# Altium PCB STM32F103ZET6.PCBDOC (part 1 of 4)
Units mil, origin at the board's own origin, x right, y up, seen from the top; angles counter-clockwise.
Board outline 4000 x 2280 mil, 2 copper layers (Top Layer, Bottom Layer); 80 components, 152 nets, 495 pads, 75 vias.
Unrouted connection lines stored in the file: 4.
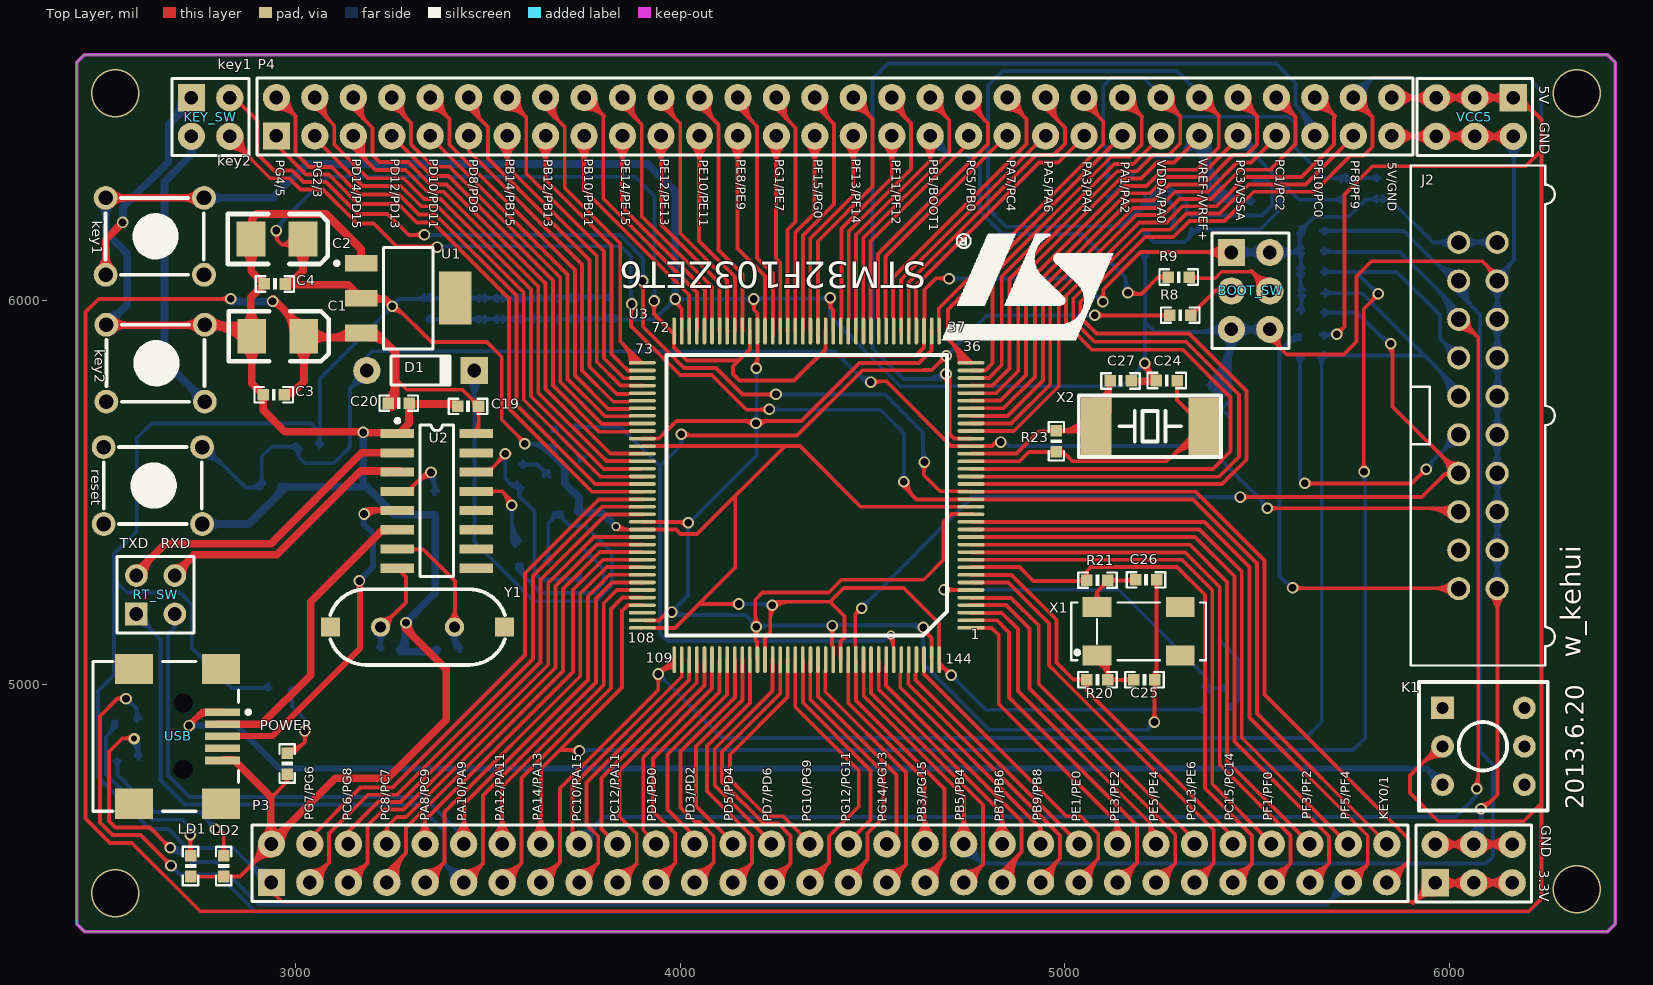
[diagram p0: Top Layer view]
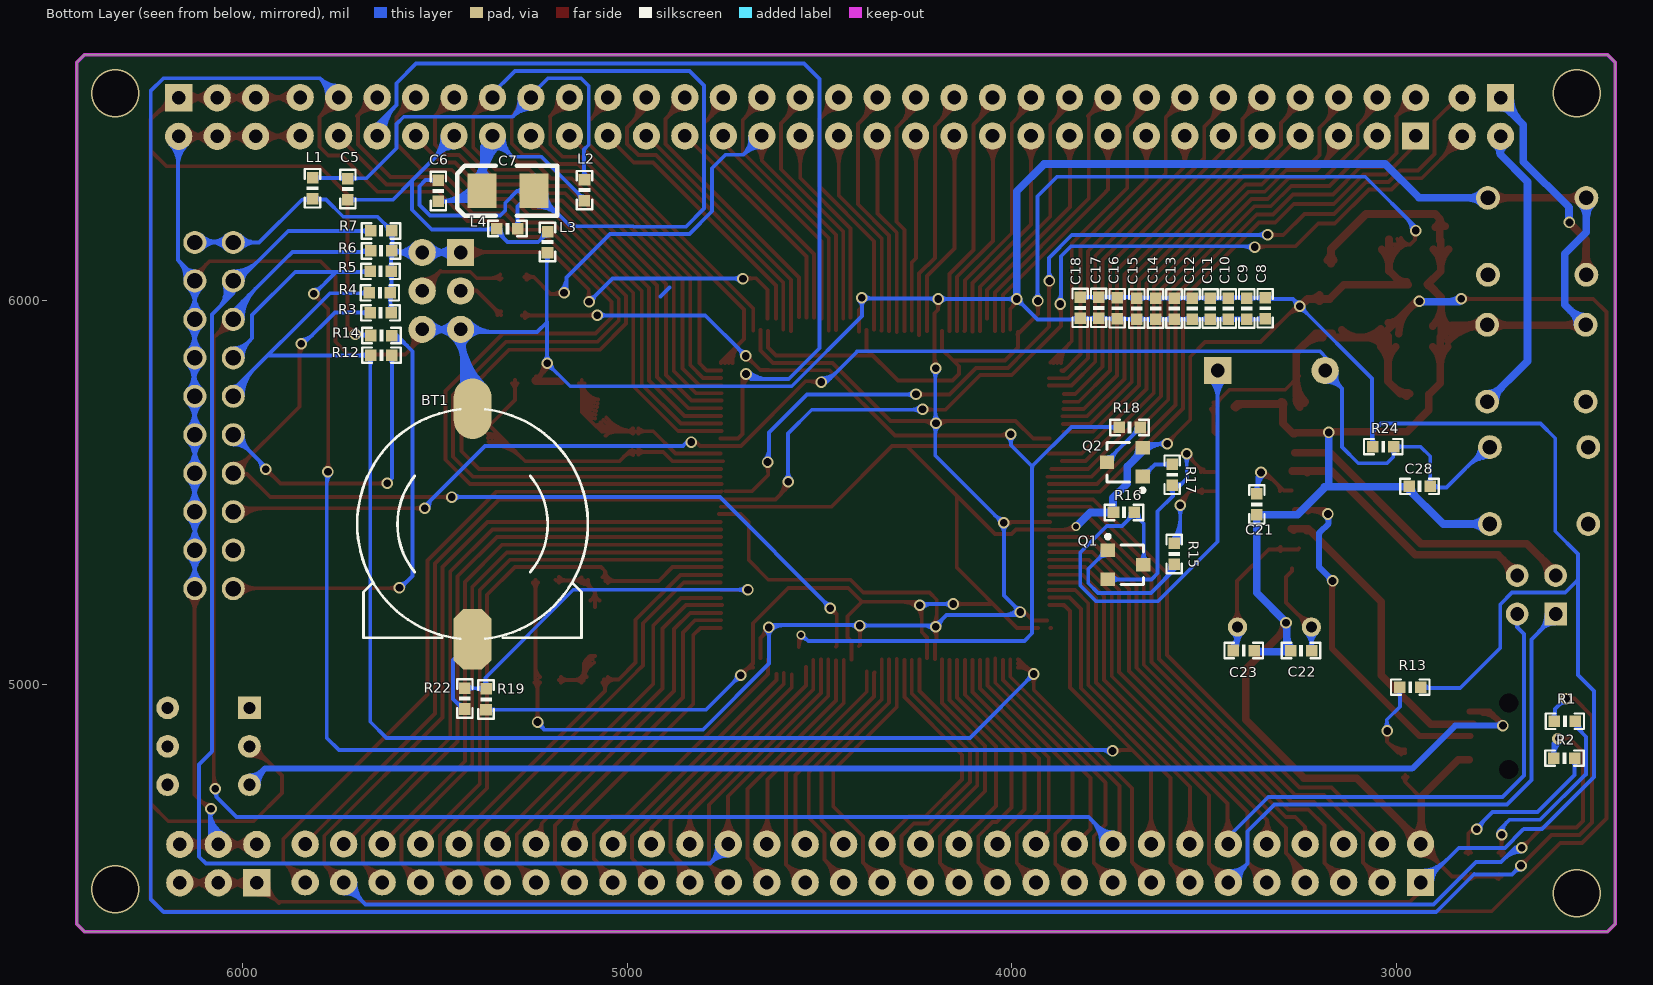
[diagram p1: Bottom Layer view, seen from below]

## Layer stack, top to bottom
Top Layer: signal copper 1.4
Dielectric: dielectric 12.6, FR-4, Dk 4.8
Bottom Layer: signal copper 1.4

## Board outline
2431,4378 2431,6618 2451,6638 6411,6638 6431,6618 6431,4378 6411,4358 2451,4358

## Design rules (kind name [scope] priority, off if disabled: settings)
Clearance [All] p1: gap=9
ComponentClearance [All] p1: gap=1 collisioncheckmode=3 verticalgap=1
HoleSize [All] p1: absolutevalues=TRUE maxlimit=300 minlimit=1 maxpercent=80.000 minpercent=20.000
PlaneConnect [All] p1: planeconnectstyle=Direct reliefexpansion=20 reliefentries=4 reliefconductorwidth=10 reliefairgap=10
PolygonConnect [All] p1: connectstyle=Direct reliefconductorwidth=10 reliefentries=4 polygonreliefangle="90 Angle"
RoutingVias [All] p1: holewidth=2 width=50 viastyle="Through Hole" minholewidth=1 minwidth=1 maxholewidth=200 maxwidth=300
SolderMaskExpansion [All] p1: expansion=4
TestPointUsage [All] p1: valid=0 allowmultiple=FALSE
Testpoint [All] p1: side=3 testpointundercomponent=TRUE minsize=40 maxsize=100 preferedsize=60 minholesize=0 maxholesize=40 preferedholesize=32 testpointgrid=1 style=297 order=0-112345678
Width [All] p1: maxlimit=80 minlimit=10 preferedwidth=10
16 further rules are at their usual default settings.

## Classes and differential pairs
component class STM32F103ZET6: Designator2 J2 U?

## Components (designator, comment, footprint, x,y, rotation, side; value= is the part's Value field where it differs from the comment)
3.3V "Header 3X2" HDR2X3 5963,4485 r0 top (schematic designator "VCC 2")
BOOT_SW "Header 3X2" HDR2X3 5433,6124 r270 top (schematic designator BOOT1)
BT1 "CR1220 holder" BAT 5402,5118 r0 bottom
C1 "220uF" 3528 3021,5906 r0 top
C2 "47uF" 3528 3019,6159 r0 top
C3 "100nF" 0603P 2943,5754 r180 top
C4 "100nF" 0603P 2946,6042 r180 top
C5 "100nF" 0603P 5726,6289 r270 bottom
C6 "100nF" 0603P 5491,6284 r90 bottom
C7 "10uF" 3528 5377,6284 r0 bottom
C8 "100nF" 0603P 3341,5979 r270 bottom
C9 "100nF" 0603P 3389,5978 r270 bottom
C10 "100nF" 0603P 3437,5978 r270 bottom
C11 "100nF" 0603P 3484,5978 r270 bottom
C12 "100nF" 0603P 3531,5978 r270 bottom
C13 "100nF" 0603P 3578,5978 r270 bottom
C14 "100nF" 0603P 3626,5978 r270 bottom
C15 "100nF" 0603P 3675,5978 r270 bottom
C16 "100nF" 0603P 3726,5979 r270 bottom
C17 "100nF" 0603P 3774,5980 r270 bottom
C18 "100nF" 0603P 3822,5980 r270 bottom
C19 "Cap" 0603P 3448,5724 r0 top
C20 "Cap" 0603P 3268,5732 r180 top
C21 "104" 0603P 3363,5469 r90 bottom
C22 "22" 0603P 3248,5089 r180 bottom
C23 "22" 0603P 3397,5089 r0 bottom
C24 "20pF" 0603P 5265,5791 r180 top
C25 "10pF" 0603P 5207,5013 r180 top
C26 "10pF" 0603P 5211,5273 r0 top
C27 "20pF" 0603P 5145,5790 r0 top
C28 "100nF" 0603P 2940,5516 r180 bottom
D1 "1N4148" DO-35 3325,5817 r0 top
J2 "JTAG" JTAG_20PIN 6024,6150 r0 top
K1 "BUTTON" BTN8.5*8.5 5982,4940 r0 top
key1 "KEY_M" KEY_M 2506,6266 r0 top
key2 "KEY_M" KEY_M 2508,5936 r0 top
KEY_SW "Header 2X2" HDR2X2#1 2729,6526 r270 top (schematic designator P2)
L1 "BEAD" 0603P 5818,6291 r270 bottom
L2 "BEAD" 0603P 5111,6286 r90 bottom
L3 "BEAD" 0603P 5207,6151 r270 bottom
L4 "BEAD" 0603P 5311,6186 r0 bottom
LD1 "Green" 0603P 2727,4529 r270 top
LD2 "Orange" 0603P 2813,4529 r270 top
P3 "Header 30X2" 60pin#1 2937,4486 r90 top
P4 "Header 30X2" 60pin#2 2950,6427 r90 top
POWER "red" 0603P 2978,4795 r270 top (schematic designator LD3)
Q1 "NPN" SOT-23R 3709,5312.2 r270 bottom
Q2 "PNP" SOT-23R 3701,5578.8 r90 bottom
R1 "600" 0603P 2562,4905 r0 bottom
R2 "600" 0603P 2563,4809 r0 bottom
R3 "10K" 0603P 5641,5967 r180 bottom
R4 "10K" 0603P 5643,6019 r180 bottom
R5 "10K" 0603P 5641,6075 r180 bottom
R6 "10K" 0603P 5640,6128 r180 bottom
R7 "10K" 0603P 5640,6180 r180 bottom
R8 "Res2" 0603P 5300,5961 r0 top
R9 "Res2" 0603P 5296,6060 r180 top
R12 "0" 0603P 5639,5857 r0 bottom
R13 "2k" 0603P 2964,4994 r180 bottom
R14 "0" 0603P 5639,5908 r0 bottom
R15 "Res2" 0603P 3708,5448 r0 bottom
R16 "Res2" 0603P 3578,5340 r90 bottom
R17 "Res2" 0603P 3583,5546 r270 bottom
R18 "Res2" 0603P 3694,5669 r180 bottom
R19 "0" 0603P 5367,4962 r90 bottom
R20 "0" 0603P 5085,5013 r180 top
R21 "0" 0603P 5085,5272 r180 top
R22 "0" 0603P 5422,4964 r90 bottom
R23 "1M" 0603P 4978,5633 r270 top
R24 "10K" 0603P 3034,5619 r0 bottom
reset "RESET" KEY_M 2501,5618 r0 top (schematic designator S1)
RT_SW "USART1" HDR2X2#2 2586,5184 r0 top (schematic designator P5)
U1 "LM1117-3.3" 1117 3357,6137 r270 top
U2 "CH340G" SOP16M 3367,5478 r270 top
U3 "STM32F103ZET6" TQFP144-B 4756,5148 r180 top
USB "USB5" USB/SM0.8-6H5 2501,4866 r180 top (schematic designator USB_1)
VCC5 "Header 3X2" HDR2X3 6166,6526 r180 top (schematic designator "VCC 1")
X1 "MC306-G-06Q-32.768 (manufacturer JFVNY)" SM8 5192,5139 r0 top
X2 "8MHz" XTAL_16S 5221,5672 r180 top
Y1 "12M" XTAL_US 3221,5150 r0 top

## Footprints (in the part's own frame and the unit in brackets; to place one, negate y for a bottom-side part, rotate by r counter-clockwise, add the part's x,y. Pads: shape width x height; smd on the part's side, far side on the other; paste and mask are expansions set on the pad)
60pin#1 [mm]
  rect 1.8x1.8 hole 0.9: 1(0,0)
  round 1.8 hole 0.9: 2(2.54,0) 3(0,-2.54) 4(2.54,-2.54) 5(0,-5.08) 6(2.54,-5.08) 7(0,-7.62) 8(2.54,-7.62) 9(0,-10.16) 10(2.54,-10.16) 11(0,-12.7) 12(2.54,-12.7) 13(0,-15.24) 14(2.54,-15.24) 15(0,-17.78) 16(2.54,-17.78) 17(0,-20.32) 18(2.54,-20.32) 19(0,-22.86) 20(2.54,-22.86) 21(0,-25.4) 22(2.54,-25.4) 23(0,-27.94) 24(2.54,-27.94) 25(0,-30.48) 26(2.54,-30.48) 27(0,-33.02) 28(2.54,-33.02) 29(0,-35.56) 30(2.54,-35.56) 31(0,-38.1) 32(2.54,-38.1) 33(0,-40.64) 34(2.54,-40.64) 35(0,-43.18) 36(2.54,-43.18) 38(2.54,-45.72) 40(2.54,-48.26) 42(2.54,-50.8) 44(2.54,-53.34) 46(2.54,-55.88) 48(2.54,-58.42) 50(2.54,-60.96) 52(2.54,-63.5) 54(2.54,-66.04) 56(2.54,-68.58) 58(2.54,-71.12) 60(2.54,-73.66)
  oval 1.7x1.8 hole 0.9: 37(0,-45.72) 39(0,-48.26) 41(0,-50.8) 43(0,-53.34) 45(0,-55.88) 47(0,-58.42) 49(0,-60.96) 51(0,-63.5) 53(0,-66.04) 55(0,-68.58) 57(0,-71.12) 59(0,-73.66)
  silkscreen extent -1.27,-75.06 3.81,1.27
60pin#2 [mm]
  rect 1.8x1.8 hole 0.9: 1(0,0)
  round 1.8 hole 0.9: 2(2.54,0) 3(0,-2.54) 4(2.54,-2.54) 5(0,-5.08) 6(2.54,-5.08) 7(0,-7.62) 8(2.54,-7.62) 9(0,-10.16) 10(2.54,-10.16) 11(0,-12.7) 12(2.54,-12.7) 13(0,-15.24) 14(2.54,-15.24) 15(0,-17.78) 16(2.54,-17.78) 17(0,-20.32) 18(2.54,-20.32) 19(0,-22.86) 20(2.54,-22.86) 21(0,-25.4) 22(2.54,-25.4) 23(0,-27.94) 24(2.54,-27.94) 25(0,-30.48) 26(2.54,-30.48) 27(0,-33.02) 28(2.54,-33.02) 29(0,-35.56) 30(2.54,-35.56) 31(0,-38.1) 32(2.54,-38.1) 33(0,-40.64) 34(2.54,-40.64) 35(0,-43.18) 36(2.54,-43.18) 37(0,-45.72) 38(2.54,-45.72) 39(0,-48.26) 40(2.54,-48.26) 41(0,-50.8) 42(2.54,-50.8) 43(0,-53.34) 44(2.54,-53.34) 45(0,-55.88) 46(2.54,-55.88) 47(0,-58.42) 48(2.54,-58.42) 49(0,-60.96) 50(2.54,-60.96) 51(0,-63.5) 52(2.54,-63.5) 53(0,-66.04) 54(2.54,-66.04) 55(0,-68.58) 56(2.54,-68.58) 57(0,-71.12) 58(2.54,-71.12) 59(0,-73.66) 60(2.54,-73.66)
  silkscreen extent -1.27,-75.06 3.81,1.27
0603P [mil]
  rect 30x30 smd: 1(-27,0) 2(27.5,-0.06)
  silkscreen extent -50,-20 50,20
1117 [mm]
  rect 1.1x2.15 smd: 1(1.05,-4.725) 2(3.35,-4.725) 3(5.65,-4.725)
  rect 3.5x2.15 smd: 4(3.35,1.475)
  silkscreen extent 0,-6.47 6.7,0
3528 [mil]
  rect 75x90 smd: 1(0,0) 2(-135,0)
  silkscreen extent -195,-65 65,65
BAT [mm]
  oct 2.5x4 smd: 1(-0.002,0.005)
  oval 2.5x4 smd: 2(-0.002,-15.235)
  round 0 all layers, no hole: ""(-0.027,-3.865) ""(-0.002,-11.365)
  silkscreen extent -7.62,-15.19 7.62,-0.04
BTN8.5*8.5 [mm]
  rect 1.5x1.5 hole 0.8: 1(0,0)
  round 1.5 hole 0.8: 2(0,-2.54) 3(0,-5.08) 4(5.4,-5.08) 5(5.4,-2.54) 6(5.4,0)
  silkscreen extent -1.55,-6.79 6.95,1.71
DO-35 [mm] "Diode, Axial; Body 3.8 x 1.9 mm (LxDia. max), Lead Dia. 0.53 mm (max)"
  round 1.8 hole 0.9: 1(-3.55,0)
  rect 1.8x1.8 hole 0.9: 2(3.55,0)
  silkscreen extent -1.95,-0.95 2.05,0.95
HDR2X2#1 [mm] "Connector; Header; 2x2 Position"
  rect 1.8x1.8 hole 0.9: 1(0,0)
  round 1.8 hole 0.9: 2(0,2.54) 3(2.54,0) 4(2.54,2.54)
  silkscreen extent -1.27,-1.27 3.81,3.81
HDR2X2#2 [mm] "Connector; Header; 2x2 Position"
  rect 1.5x1.5 hole 0.9: 1(0,0)
  round 1.5 hole 0.9: 2(0,2.54) 3(2.54,0) 4(2.54,2.54)
  silkscreen extent -1.27,-1.27 3.81,3.81
HDR2X3 [mm] "Connector; Header; 3x2 Position"
  rect 1.8x1.8 hole 0.9: 1(0,0)
  round 1.8 hole 0.9: 2(0,2.54) 3(2.54,0) 4(2.54,2.54) 5(5.08,0) 6(5.08,2.54)
  silkscreen extent -1.27,-1.27 6.35,3.81
JTAG_20PIN [mil]
  round 60 hole 40: 1(0,0) 2(100,0) 3(0,-100) 4(100,-100) 5(0,-200) 6(100,-200) 7(0,-300) 8(100,-300) 9(0,-400) 10(100,-400) 11(0,-500) 12(100,-500) 13(0,-600) 14(100,-600) 15(0,-700) 16(100,-700) 17(0,-800) 18(100,-800) 19(0,-900) 20(100,-900)
  silkscreen extent -125,-1100 250,200
KEY_M [mil]
  round 62 hole 38: 1(0,0) 1(255.91,0) 2(0,-200) 2(255.91,-200)
  silkscreen extent 0,-200 255,0
SM8 [mm]
  rect 1.9x1.3 smd: 1(-2.75,-1.6) 2(2.75,-1.6) 3(2.75,1.6) 4(-2.75,1.6)
  silkscreen extent -4.44,-1.91 4.44,1.91
SOP16M [mm]
  rect 0.6x2.2 smd: 1(-4.445,-2.6) 2(-3.175,-2.6) 3(-1.905,-2.6) 4(-0.635,-2.6) 5(0.635,-2.6) 6(1.905,-2.6) 7(3.175,-2.6) 8(4.445,-2.6) 9(4.445,2.6) 10(3.175,2.6) 11(1.905,2.6) 12(0.635,2.6) 13(-0.635,2.6) 14(-1.905,2.6) 15(-3.175,2.6) 16(-4.445,2.6)
  silkscreen extent -5.42,-2.72 5,1.1
SOT-23R [mm]
  rect 0.9x0.95 smd: 1(0.95,-1.048) 2(-0.95,-1.048) 3(0,1.302)
  silkscreen extent -1.98,-1.17 1.3,1.3
TQFP144-B [mil]
  rect 70x9.5 smd: 1(0.11,0.06)
  oval 70x9.5 smd: 2(0.11,-19.63) 3(0.11,-39.31) 4(0.11,-59) 5(0.11,-78.68) 6(0.11,-98.37) 7(0.11,-118.05) 8(0.11,-137.74) 9(0.11,-157.42) 10(0.11,-177.11) 11(0.11,-196.79) 12(0.11,-216.48) 13(0.11,-236.16) 14(0.11,-255.85) 15(0.11,-275.53) 16(0.11,-295.22) 17(0.11,-314.9) 18(0.11,-334.59) 19(0.11,-354.27) 20(0.11,-373.96) 21(0.11,-393.64) 22(0.11,-413.33) 23(0.11,-433.01) 24(0.11,-452.7) 25(0.11,-472.38) 26(0.11,-492.07) 27(0.11,-511.75) 28(0.11,-531.44) 29(0.11,-551.12) 30(0.11,-570.81) 31(0.11,-590.49) 32(0.11,-610.18) 33(0.11,-629.86) 34(0.11,-649.55) 35(0.11,-669.23) 36(0.11,-688.92) 73(854.44,-688.92) 74(854.44,-669.23) 75(854.44,-649.55) 76(854.44,-629.86) 77(854.44,-610.18) 78(854.44,-590.49) 79(854.44,-570.81) 80(854.44,-551.12) 81(854.44,-531.44) 82(854.44,-511.75) 83(854.44,-492.07) 84(854.44,-472.38) 85(854.44,-452.7) 86(854.44,-433.01) 87(854.44,-413.33) 88(854.44,-393.64) 89(854.44,-373.96) 90(854.44,-354.27) 91(854.44,-334.59) 92(854.44,-314.9) 93(854.44,-295.22) 94(854.44,-275.53) 95(854.44,-255.85) 96(854.44,-236.16) 97(854.44,-216.48) 98(854.44,-196.79) 99(854.44,-177.11) 100(854.44,-157.42) 101(854.44,-137.74) 102(854.44,-118.05) 103(854.44,-98.37) 104(854.44,-78.68) 105(854.44,-59) 106(854.44,-39.31) 107(854.44,-19.63) 108(854.44,0.06)
  oval 9.5x70 smd: 37(82.79,-771.6) 38(102.47,-771.6) 39(122.16,-771.6) 40(141.84,-771.6) 41(161.53,-771.6) 42(181.21,-771.6) 43(200.9,-771.6) 44(220.58,-771.6) 45(240.27,-771.6) 46(259.95,-771.6) 47(279.64,-771.6) 48(299.32,-771.6) 49(319.01,-771.6) 50(338.69,-771.6) 51(358.38,-771.6) 52(378.06,-771.6) 53(397.75,-771.6) 54(417.43,-771.6) 55(437.12,-771.6) 56(456.8,-771.6) 57(476.49,-771.6) 58(496.17,-771.6) 59(515.86,-771.6) 60(535.54,-771.6) 61(555.23,-771.6) 62(574.91,-771.6) 63(594.6,-771.6) 64(614.28,-771.6) 65(633.97,-771.6) 66(653.65,-771.6) 67(673.34,-771.6) 68(693.02,-771.6) 69(712.71,-771.6) 70(732.39,-771.6) 71(752.08,-771.6) 72(771.76,-771.6) 109(771.76,82.73) 110(752.08,82.73) 111(732.39,82.73) 112(712.71,82.73) 113(693.02,82.73) 114(673.34,82.73) 115(653.65,82.73) 116(633.97,82.73) 117(614.28,82.73) 118(594.6,82.73) 119(574.91,82.73) 120(555.23,82.73) 121(535.54,82.73) 122(515.86,82.73) 123(496.17,82.73) 124(476.49,82.73) 125(456.8,82.73) 126(437.12,82.73) 127(417.43,82.73) 128(397.75,82.73) 129(378.06,82.73) 130(358.38,82.73) 131(338.69,82.73) 132(319.01,82.73) 133(299.32,82.73) 134(279.64,82.73) 135(259.95,82.73) 136(240.27,82.73) 137(220.58,82.73) 138(200.9,82.73) 139(181.21,82.73) 140(161.53,82.73) 141(141.84,82.73) 142(122.16,82.73) 143(102.47,82.73) 144(82.79,82.73)
  silkscreen extent 63,-709 792,20
USB/SM0.8-6H5 [mm]
  rect 2.3x0.5 smd: 1(-7.85,-1.6) 2(-7.85,-0.8) 3(-7.85,0) 4(-7.85,0.8) 5(-7.85,1.6)
  rect 2.5x2 smd: 6(-7.75,4.45) 7(-1.996,4.45) 8(-7.75,-4.45) 9(-1.996,-4.45)
  round 0.6 hole 1.27 unplated: MH1(-5.25,2.2) MH2(-5.25,-2.2)
  silkscreen extent -9.68,-4.95 0.7,4.95
XTAL_16S [mil]
  rect 80x150 smd: 1(-140,0) 2(140,0)
  silkscreen extent -185,-80 185,80
XTAL_US [mil]
  round 50 hole 28: 1(0,0) 2(192.13,0)
  rect 50x50 smd: ""(-130.32,0) ""(322.44,0)
  silkscreen extent -131,-98 323,98

## Part data
3.3V BOOT_SW VCC5: "Header, 3-Pin, Dual row"
BT1: library part BATTERY, "Battery"
C1 C2: library part "Cap Pol1", "Polarized Capacitor (Radial)"
C3 C4 C5 C6 C7: library part Cap, "Capacitor"
C8 C9 C10 C11 C12 C13 C14 C15 C16 C17 C18 C24 C25 C26 C27 C28: library part CAP, "Capacitor"
C19 C20: "Capacitor"
C21 C22 C23: library part C
D1: library part "Diode 1N4148", "High Conductance Fast Diode"
J2: library part "HEADER 10X2"
KEY_SW: "Header, 2-Pin, Dual row"
L1 L2 L3 L4: library part Inductor, "Inductor"
LD1 LD2 POWER: library part LED2, "Typical RED, GREEN, YELLOW, AMBER GaAs LED"
P3 P4: "Header, 30-Pin, Dual row"
Q1: "8050/BCW846/BCW847"
Q2: "8550/BCW68"
R1 R2 R3 R4 R5 R6 R7 R12 R14 R19 R20 R21 R22 R23: library part Res1, "Resistor"
R8 R9 R15 R16 R17 R18: "Resistor"
R13 R24: library part res1, "Resistor"
reset: library part SW-PB
RT_SW: library part "Header 2X2", "Header, 2-Pin, Dual row"
U1: library part VOLTREG1
U2: "USB2UART"
X1: library part MC306
X2: library part CRYSTAL, "Crystal"
Y1: library part XTAL, "Crystal Oscillator"

## Via types
v1: diameter 30, hole 20, Top Layer to Bottom Layer, 68 vias
v2: diameter 125.98, hole 118.11, Top Layer to Bottom Layer, 4 vias
v3: diameter 23.62, hole 15.75, Top Layer to Bottom Layer, 2 vias
v4: diameter 30, hole 15, Top Layer to Bottom Layer, 1 vias

## Nets (pads, with @x,y where several pads share a name; then routed paths per layer and width w, separated by ;. In a path a pad name is that pad's centre, name@x,y a point inside that pad or via, vN(x,y) a via of type N, cw(c..) or ccw(c..) an arc to the next point about the centre after c; other vN are vias at no path point)
+3V3: 3.3V.1 3.3V.3 3.3V.5 BOOT_SW.1 BOOT_SW.2 C2.1 C4.1 C8.1 C9.1 C10.1 C11.1 C12.1 C13.1 C14.1 C15.1 C16.1 C17.1 C18.1 J2.1 J2.2 L1.2 P3.1 Q2.1 R3.2 R4.2 R5.2 R6.2 R7.2 R13.2 R15.2 R19.1 R24.2 U1.2 U3.17 U3.39 U3.52 U3.62 U3.72 U3.84 U3.95 U3.108 U3.121 U3.131 U3.144 | length 21777.5
  Top Layer w10: P3.1@2930,4483 2930,4471 2965,4436 5908,4436 5954,4482 3.3V.1@5968,4482 ; P3.1@2937,4455.57 cw(c2937,4435.21) 2951.4,4449.6 ; v1@2943.98,6173.02 cw(c2931.84,6156.92) 2952,6156.92 ; 2952,6161.69 cw(c2969.31,6161.69) v1@2957.07,6173.93 ; v1@2952,6180 2952,6157 2964,6145 ; 2978.1,6145 ccw(c2978.1,6165.84) C2.1@2997.77,6158.94 ; C2.1@2988.33,6162.25 cw(c2964,6170.78) 2964,6145 ; C2.1@2993.88,6130.87 ccw(c2964,6106.33) 2964,6145 ; C2.1@3021,6145 2964,6145 ; v1@3251,5974 cw(c3251,5928.13) 3283.44,5960.56 ; v1(3251,5984) cw(c3251,5962.27) 3266.36,5977.64 ; v1@3252,5985 3259,5985 3353,5891 3498,5891 3536,5853 3536,5689 v1@3597,5628 ; 3577.51,5647.49 cw(c3557.03,5627) v1@3586,5627 ; 3582.34,5642.66 ccw(c3596,5656.31) v1@3596,5637 ; v3@3830.75,5408.75 ccw(c3844.61,5422.61) 3844.61,5403 ; v3@3831,5413 3841,5403 U3.95@3899,5403 ; v3@3837.82,5415.82 ccw(c3868.76,5446.76) U3.95@3868.76,5403 ; U3.108@3898,5148 U3.108@3899,5148 ; U3.95@3901.56,5403.85 3989.15,5403.85 4001,5392 4044,5392 4272,5620 ; U3.84@3901.56,5621 4311,5621 4469,5463 U3.17@4755.89,5463 ; v1@3924.93,5990.93 cw(c3907.86,5973.86) 3932,5973.86 cw(c3956.14,5973.86) v1@3939.07,5990.93 ; U3.108@3931,5148 3986,5148 4143,5305 4143,5486 ; v1@3932,5999 3932,5964 U3.72@3985,5911 ; U3.72@3984,5918 3984,5877 4018,5843 4151,5843 4151,5842 4137,5828 4137,5808 4154,5791 4295.81,5791 4341,5836.19 4341,5837 4360,5856 4613,5856 4634,5877 U3.39@4634,5920 ; 4055,5210 v1(4152,5210) ; v1@4144.93,5202.93 ccw(c4127.86,5185.86) 4127.86,5210 ccw(c4127.86,5234.14) v1@4144.93,5217.07 ; 4152,5843 4181,5872 U3.62@4181.09,5919.6 ; U3.121@4220,5070 4220,5123 4234,5137 4234,5201 4249,5216 4392,5216 ; 4234,5170.79 cw(c4275.21,5170.79) 4246.07,5199.93 cw(c4284.87,5161.13) 4284.87,5216 ; v1(4239,5207) cw(c4260.73,5185.27) 4260.73,5216 ; 4343,5837 4378,5872 U3.52@4378,5922 ; U3.131@4417,5065.27 4417,5113 4427,5123 4427,5178 4389,5216 4425,5252 4581,5252 4673,5160 U3.144@4673,5063 ; U3.39@4635,5952.73 4635,6027 4665,6057 v1@4700,6057 ; 4672.44,6057 cw(c4672.44,6029.44) v1@4691.93,6048.93 ; U3.144@4673,5060 4673,5057 v1@4704,5026 ; U3.144@4673.21,5045.27 cw(c4673.21,5017.46) 4692.88,5037.12 ; U3.144@4673.21,5055.27 cw(c4673.21,5051.6) U3.144@4675.81,5054.19 ; 4677.27,6057 ccw(c4677.27,6077.73) v1@4691.93,6063.07 ; v1@4695,5025 ccw(c4670.86,5025) 4687.93,5042.07 ccw(c4705,5059.14) v1@4705,5035 ; v1@5091.93,6003.07 ccw(c5072.44,6022.56) 5100,6022.56 ; v1@5100,5994 5100,6027.91 5197.09,6125 BOOT_SW.1@5438,6125 ; 5100,6017.73 ccw(c5120.73,6017.73) v1@5106.07,6003.07 ; 5357.11,6125 cw(c5357.11,6048.11) BOOT_SW.1@5411.48,6102.48 ; 5361.94,6125 ccw(c5361.94,6195.06) BOOT_SW.1@5411.48,6145.52 ; 5381.26,6125 cw(c5381.26,6072.26) BOOT_SW.1@5418.55,6109.55 ; 5386.08,6125 ccw(c5386.08,6170.92) BOOT_SW.1@5418.55,6138.45 ; 5905,4433 cw(c5957.42,4380.58) 3.3V.1@5961.38,4454.61 ; 5915.29,4443.29 ccw(c5873.58,4485) 3.3V.1@5932.57,4485 ; 5920.86,4448.86 cw(c5959.03,4410.69) 3.3V.1@5961.91,4464.6 ; 3.3V.1@5932.36,4460.36 ccw(c5907.72,4485) 3.3V.1@5942.57,4485 ; 3.3V.1@5961,4483 6065,4483 3.3V.3@6066,4484 ; 3.3V.1@5977.45,4470.55 cw(c6007.5,4440.5) 6007.5,4483 ; 3.3V.1@5977.45,4499.45 ccw(c6017.16,4539.16) 6017.16,4483 ; 3.3V.1@5984.52,4463.48 cw(c6031.64,4416.36) 3.3V.3@6031.64,4483 ; 3.3V.1@5984.52,4506.52 ccw(c6041.3,4563.3) 3.3V.3@6041.3,4483 ; 3.3V.1@5984.7,4483 ccw(c5984.7,4563.3) 3.3V.3@6041.48,4506.52 ; 3.3V.1@5994.36,4483 cw(c5994.36,4416.36) 3.3V.3@6041.48,4463.48 ; 6008.84,4483 ccw(c6008.84,4539.16) 3.3V.3@6048.55,4499.45 ; 6018.5,4483 cw(c6018.5,4440.5) 3.3V.3@6048.55,4470.55 ; 3.3V.3@6061,4486 3.3V.5@6171,4486 ; 3.3V.3@6077.45,4470.55 cw(c6114.74,4433.26) 6114.74,4486 ; 3.3V.3@6077.45,4499.45 ccw(c6109.92,4531.92) 6109.92,4486 ; 3.3V.3@6084.52,4463.48 cw(c6138.89,4409.11) 3.3V.5@6138.89,4486 ; 3.3V.3@6084.52,4506.52 ccw(c6134.06,4556.06) 3.3V.5@6134.06,4486 ; 3.3V.3@6087.11,4486 cw(c6087.11,4409.11) 3.3V.5@6141.48,4463.48 ; 3.3V.3@6091.94,4486 ccw(c6091.94,4556.06) 3.3V.5@6141.48,4506.52 ; 6111.26,4486 cw(c6111.26,4433.26) 3.3V.5@6148.55,4470.55 ; 6116.08,4486 ccw(c6116.08,4531.92) 3.3V.5@6148.55,4499.45
  Top Layer w20: C4.1@2970,6040 3137,6040 U1.2@3172,6005 ; C4.1@2973,6042 2985,6042 3019,6076 C2.1@3019,6158 ; C4.1@2973,6047 ccw(c2973,6088.04) 3002.02,6059.02 ; C4.1@2976.54,6045.54 ccw(c2989.9,6058.9) 2989.9,6040 ; C2.1@2999.55,6132.05 cw(c2952.61,6085.11) 3019,6085.11 cw(c3085.39,6085.11) C2.1@3038.45,6132.05 ; U1.2@3173,6003 3231,6003 v1@3250,5984 ; U1.2@3199.89,5996.87 cw(c3214.69,5982.07) 3214.69,6003 ; U1.2@3199.89,6013.35 ccw(c3224.87,6038.34) 3224.87,6003
  Bottom Layer w10: 2486,4984 2486,4760 2621,4625 2669,4625 ; 2487.84,4984.84 2528,5025 2528,5272 2529,5273 ; 2672,4622 2718,4576 2838,4576 2932,4482 P3.1@2939,4482 ; 2869.68,4544.32 ccw(c2937,4611.63) P3.1@2937,4516.43 ; 2886.75,4527.25 ccw(c2937,4577.49) P3.1@2937,4506.43 ; 2891.41,4522.59 cw(c2854.82,4486) P3.1@2906.57,4486 ; P3.1@2903.83,4510.17 ccw(c2937,4543.35) P3.1@2937,4496.43 ; 2907.68,4992 ccw(c2907.68,5022.75) R13.2@2929.43,5001.01 ; 2917.03,4992 cw(c2917.03,4974.47) R13.2@2929.43,4986.86 ; R13.2@2936,4992 2834,4992 2730,5096 2730,5209 2699,5240 2561,5240 2528,5273 2528,5340 2587,5399 2587,5641 2625,5679 3039,5679 ; v1@2945,6185 3081,6321 3882,6321 3933,6270 v1@3933,6003 ; v1(2950,6181) cw(c2971.73,6181) 2956.36,6196.36 ; v1@2960,6181 cw(c3005.87,6181) 2973.44,6213.44 ; 3040,5679 3062,5657 R24.2@3062,5618 ; 3062,5642 ccw(c3084.43,5642) 3068.57,5626.14 cw(c3082.02,5639.58) 3063,5639.58 ; 3062,5644.41 cw(c3036.15,5644.41) 3054.43,5626.14 ccw(c3033.74,5646.83) 3063,5646.83 ; R24.2@3063,5621 3063,5796 v1@3250,5983 ; v1@3241,5984 cw(c3216.86,5984) 3233.93,5966.93 cw(c3251,5949.86) v1@3251,5974 ; v1@3251,5985 3269,6003 C8.1@3343,6003 ; v1@3251,5994 ccw(c3251,6015.73) 3266.36,6000.36 ; v1@3261,5984 cw(c3287.56,5984) 3268.78,6002.78 ; 3309.62,6003 ccw(c3309.62,6037.38) C8.1@3333.93,6013.07 ; 3324.1,6003 cw(c3324.1,5989.1) C8.1@3333.93,5998.93 ; C8.1@3340,6006 3341,6005 C9.1@3388,6005 ; C8.1@3348.07,5998.93 cw(c3362.73,5984.27) 3362.73,6005 ; C8.1@3348.07,6013.07 ccw(c3367.56,6032.56) 3367.56,6005 ; C9.1@3381.93,5997.93 ccw(c3364.86,5980.86) 3364.86,6005 ccw(c3364.86,6029.14) C9.1@3381.93,6012.07 ; C9.1@3390,6006 3391,6007 3437,6007 3439,6005 3485,6005 3486,6006 3578,6006 3579,6005 3627,6005 3628,6006 3673,6006 3676,6009 3772,6009 C17.1@3774,6007 3775,6008 C18.1@3822,6008 ; C9.1@3396.07,5997.93 cw(c3417.97,5976.03) 3417.97,6007 ; C9.1@3396.07,6012.07 ccw(c3408.31,6024.31) 3408.31,6007 ; 3408.03,6007 cw(c3408.03,5976.03) C10.1@3429.93,5997.93 ; 3417.69,6007 ccw(c3417.69,6024.31) C10.1@3429.93,6012.07 ; C10.1@3444.07,5997.93 cw(c3461.14,5980.86) 3461.14,6005 cw(c3461.14,6029.14) C10.1@3444.07,6012.07 ; C11.1@3476.93,5997.93 ccw(c3459.86,5980.86) 3459.86,6005 ccw(c3459.86,6029.14) C11.1@3476.93,6012.07 ; C11.1@3491.07,5997.93 cw(c3510.56,5978.44) 3510.56,6006 ; C11.1@3491.07,6012.07 ccw(c3505.73,6026.73) 3505.73,6006 ; 3504.44,6006 cw(c3504.44,5978.44) C12.1@3523.93,5997.93 ; 3509.27,6006 ccw(c3509.27,6026.73) C12.1@3523.93,6012.07 ; C12.1@3538.07,5997.93 cw(c3557.56,5978.44) 3557.56,6006 ; C12.1@3538.07,6012.07 ccw(c3552.73,6026.73) 3552.73,6006 ; 3551.44,6006 cw(c3551.44,5978.44) C13.1@3570.93,5997.93 ; 3556.27,6006 ccw(c3556.27,6026.73) C13.1@3570.93,6012.07 ; C13.1@3585.07,5997.93 cw(c3602.14,5980.86) 3602.14,6005 cw(c3602.14,6029.14) C13.1@3585.07,6012.07 ; v1@3596,5626 3649,5626 Q2.1@3661,5614 ; v1@3603.07,5619.93 cw(c3617.73,5605.27) 3617.73,5626 ; v1@3603.07,5634.07 ccw(c3622.56,5653.56) 3622.56,5626 ; v1@3604.41,5626 cw(c3604.41,5561.86) Q2.1@3649.76,5607.21 ; C14.1@3618.93,5997.93 ccw(c3601.86,5980.86) 3601.86,6005 ccw(c3601.86,6029.14) C14.1@3618.93,6012.07 ; 3628.55,5626 cw(c3628.55,5586) Q2.1@3656.83,5614.28 ; C14.1@3633.07,5997.93 cw(c3652.56,5978.44) 3652.56,6006 ; C14.1@3633.07,6012.07 ccw(c3647.73,6026.73) 3647.73,6006 ; 3648.44,6006 cw(c3648.44,5978.44) C15.1@3667.93,5997.93 ; 3653.27,6006 ccw(c3653.27,6026.73) C15.1@3667.93,6012.07 ; C15.1@3682.07,5997.93 cw(c3708.8,5971.2) 3708.8,6009 ; C15.1@3682.07,6012.07 ccw(c3689.49,6019.49) C15.1@3689.49,6009 ; 3694.62,6009 cw(c3694.62,5974.62) C16.1@3718.93,5998.93 ; 3709.1,6009 ccw(c3709.1,6022.9) C16.1@3718.93,6013.07 ; C16.1@3733.07,5998.93 cw(c3757.38,5974.62) 3757.38,6009 ; C16.1@3733.07,6013.07 ccw(c3742.9,6022.9) 3742.9,6009 ; 3745.03,6009 cw(c3745.03,5978.03) C17.1@3766.93,5999.93 ; 3754.69,6009 ccw(c3754.69,6026.31) C17.1@3766.93,6014.07 ; C17.1@3781.07,5999.93 cw(c3800.56,5980.44) 3800.56,6008 ; C17.1@3781.07,6014.07 ccw(c3795.73,6028.73) 3795.73,6008 ; 3795.44,6008 cw(c3795.44,5980.44) C18.1@3814.93,5999.93 ; 3800.27,6008 ccw(c3800.27,6028.73) C18.1@3814.93,6014.07 ; v1@3924.93,6005.07 ccw(c3905.44,6024.56) 3933,6024.56 ; 3933,6019.73 ccw(c3953.73,6019.73) v1@3939.07,6005.07 ; v1@4153,5210 4242,5210 v1@4243,5209 ; v1@4159.07,5202.93 cw(c4176.14,5185.86) 4176.14,5210 cw(c4176.14,5234.14) v1@4159.07,5217.07 ; 4207.62,5210 cw(c4207.62,5175.62) v1@4231.93,5199.93 ; 4222.1,5210 ccw(c4222.1,5223.9) v1@4231.93,5214.07 ; v1(4699,6056) 5038,6056 v1@5099,5995 ; v1@4704,5026 4795,4935 R19.1@5367,4935 ; v1@4705,5015 cw(c4705,4990.86) 4722.07,5007.93 cw(c4739.14,5025) v1@4715,5025 ; v1@4706.07,6048.93 cw(c4723.14,6031.86) 4723.14,6056 cw(c4723.14,6080.14) v1@4706.07,6063.07 ; 5080.22,6013.78 ccw(c5099,6032.56) v1@5099,6006 ; 5082.64,6011.36 cw(c5067.27,5996) v1@5089,5996 ; R19.1@5359.93,4927.93 ccw(c5342.86,4910.86) 5342.86,4935 ccw(c5342.86,4959.14) R19.1@5359.93,4942.07 ; BOOT_SW.1@5428,6124 5429,6125 BOOT_SW.2@5534,6125 ; BOOT_SW.1@5447.45,6109.55 cw(c5484.74,6072.26) 5484.74,6125 ; BOOT_SW.1@5447.45,6138.45 ccw(c5479.92,6170.92) 5479.92,6125 ; BOOT_SW.1@5454.52,6102.48 cw(c5508.89,6048.11) BOOT_SW.2@5508.89,6125 ; BOOT_SW.1@5454.52,6145.52 ccw(c5504.06,6195.06) BOOT_SW.2@5504.06,6125 ; BOOT_SW.1@5457.11,6125 cw(c5457.11,6048.11) BOOT_SW.2@5511.48,6102.48 ; BOOT_SW.1@5461.94,6125 ccw(c5461.94,6195.06) BOOT_SW.2@5511.48,6145.52 ; 5481.26,6125 cw(c5481.26,6072.26) BOOT_SW.2@5518.55,6109.55 ; 5486.08,6125 ccw(c5486.08,6170.92) BOOT_SW.2@5518.55,6138.45 ; BOOT_SW.2@5534,6124 R6.2@5610,6124 ; BOOT_SW.2@5547.45,6109.55 cw(c5582.33,6074.67) 5582.33,6124 cw(c5582.33,6173.33) BOOT_SW.2@5547.45,6138.45 ; BOOT_SW.2@5554.52,6102.48 cw(c5606.47,6050.53) 5606.47,6124 cw(c5606.47,6197.47) BOOT_SW.2@5554.52,6145.52 ; 5578.86,6124 ccw(c5578.86,6161.58) 5605.43,6135.01 ccw(c5594.39,6146.04) 5610,6146.04 ; R6.2@5597.86,6124 cw(c5597.86,6113.3) 5605.43,6120.86 cw(c5584.74,6100.17) 5614,6100.17 ; R7.2@5605.43,6172.86 cw(c5594.39,6161.83) 5610,6161.83 ; R3.2@5606.43,5974.01 ccw(c5583.32,5997.11) 5616,5997.11 ; R5.2@5606.43,6067.86 cw(c5592.98,6054.42) 5612,6054.42 ; R5.2@5606.43,6082.01 ccw(c5588.15,6100.29) 5614,6100.29 ; R4.2@5608.43,6011.86 cw(c5590.15,5993.59) 5616,5993.59 ; R4.2@5608.43,6026.01 ccw(c5599.81,6034.63) 5612,6034.63 ; R7.2@5609,6177 5649,6217 5738,6217 5783,6262 L1.2@5814,6262 ; 5610,6149.76 cw(c5642.68,6149.76) R7.2@5619.57,6172.86 ; 5610,6158.11 ccw(c5642.68,6158.11) R6.2@5619.57,6135.01 ; R7.2@5610,6176 5610,6132 5614,6128 5614,6076 5612,6074 5612,6022 5616,6018 5616,5967 R3.2@5615,5966 ; 5612,6047.17 cw(c5641.26,6047.17) R5.2@5620.57,6067.86 ; 5612,6051.53 ccw(c5648.09,6051.53) R4.2@5622.57,6026.01 ; R7.2@5612.5,6189.94 ccw(c5612.5,6212.72) 5628.61,6196.61 ; 5614,6097.87 ccw(c5636.43,6097.87) R5.2@5620.57,6082.01 ; 5614,6107.42 cw(c5633.02,6107.42) R6.2@5619.57,6120.86 ; 5616,5985.04 ccw(c5631.61,5985.04) R3.2@5620.57,5974.01 ; 5616,5996 cw(c5638.43,5996) R4.2@5622.57,6011.86 ; R7.2@5622.5,6179.94 cw(c5648,6179.94) 5629.97,6197.97 ; 5790.3,6262 ccw(c5790.3,6291.26) L1.2@5810.99,6270.57 ; 5797.54,6262 cw(c5797.54,6242.98) L1.2@5810.99,6256.43 ; L1.2@5816,6261 5845.87,6261 ; L1.2@5825.14,6256.43 cw(c5836.17,6245.39) 5836.17,6261 ; L1.2@5825.54,6270.14 ccw(c5845.87,6288.17) 5845.87,6261 ; J2.1@6006.32,6132.32 ccw(c5963.64,6089.64) 5963.64,6150 ccw(c5963.64,6210.36) J2.1@6006.32,6167.68 ; J2.1@6013.39,6139.39 ccw(c5987.79,6113.79) 5987.79,6150 ccw(c5987.79,6186.21) J2.1@6013.39,6160.61 ; J2.1@6019,6148 6023,6152 J2.2@6128,6152 ; J2.1@6025,6150 5956.87,6150 5845.87,6261 ; J2.1@6034.61,6139.39 cw(c6065.04,6108.96) 6065.04,6152 ; J2.1@6034.61,6160.61 ccw(c6055.38,6181.38) 6055.38,6152 ; J2.1@6041.68,6132.32 cw(c6089.18,6084.82) 6089.18,6152 ; J2.1@6041.68,6167.68 ccw(c6079.53,6205.53) 6079.53,6152 ; 6058.82,6152 cw(c6058.82,6084.82) J2.2@6106.32,6132.32 ; 6068.47,6152 ccw(c6068.47,6205.53) J2.2@6106.32,6167.68 ; 6082.96,6152 cw(c6082.96,6108.96) J2.2@6113.39,6139.39 ; 6092.62,6152 ccw(c6092.62,6181.38) J2.2@6113.39,6160.61
  Bottom Layer w20: Q2.1@3660,5617 3660,5607 3700,5567 ; Q2.1@3668.44,5616.2 ccw(c3711.04,5616.2) 3680.92,5586.08 ; 3700,5568 3700,5523 3737,5486 R15.2@3737,5448 ; R15.2@3731.96,5451.6 ccw(c3719.81,5463.76) 3737,5463.76 ; R15.2@3736,5448 3796,5448 v3@3830,5414
  other v1: 4705,5025 3596,5627 5099,5996 3932,5998
  other v3: 3833,5411
+5V: C1.1 C3.1 C19.2 C20.2 K1.2 P4.60 R14.2 U1.3 U2.16 VCC5.1 VCC5.3 VCC5.5 | length 13062.8
  Top Layer w10: 2804.44,6003 ccw(c2804.44,6030.56) v1@2823.93,6011.07 ; 2809.27,6003 cw(c2809.27,5982.27) v1@2823.93,5996.93 ; v1@2833,6003 2488,6003 2454,5969 2454,4652 2517,4589 2574,4589 2752,4411 6206,4411 6239,4444 6239,6470 6184,6525 VCC5.1@6173,6525 ; 3253.5,5802.5 3288.97,5767.03 3433.97,5767.03 C19.2@3476,5725 ; 3457.32,5743.68 cw(c3437.58,5723.94) C19.2@3465.5,5723.94 ; 3461.1,5739.9 ccw(c3475.5,5754.3) C19.2@3475.5,5733.94 ; U2.16@3464.55,5657.82 ccw(c3436.89,5685.47) 3476,5685.47 ; C19.2@3468.43,5716.86 cw(c3450.15,5698.59) 3476,5698.59 ; U2.16@3471,5652 3476,5657 C19.2@3476,5724 ; 3476,5701 cw(c3498.43,5701) C19.2@3482.57,5716.86 ; v1(5707,5911) 5727,5931 5727,6275 5800,6348 6198,6348 6239,6389 ; v1@5707,5921 ccw(c5707,5945.14) 5724.07,5928.07 ccw(c5741.14,5911) v1@5717,5911 ; P4.60@5850,6526 VCC5.5@5966,6526 ; P4.60@5864.45,6512.55 cw(c5896.92,6480.08) 5896.92,6526 ; P4.60@5864.45,6541.45 ccw(c5901.74,6578.74) 5901.74,6526 ; P4.60@5871.52,6505.48 cw(c5921.06,6455.94) 5921.06,6526 ; P4.60@5871.52,6548.52 ccw(c5925.89,6602.89) 5925.89,6526 ; 5924.77,4791.76 cw(c5982,4734.53) K1.2@5982,4815.47 ; 5941.84,4808.84 cw(c5982,4768.67) K1.2@5982,4825.47 ; VCC5.5@5944.48,6504.48 ccw(c5892.53,6452.53) 5892.53,6526 ccw(c5892.53,6599.47) VCC5.5@5944.48,6547.52 ; 5946.49,4813.49 ccw(c5919.99,4840) K1.2@5957.47,4840 ; VCC5.5@5951.55,6511.55 ccw(c5916.67,6476.67) 5916.67,6526 ccw(c5916.67,6575.33) VCC5.5@5951.55,6540.45 ; VCC5.5@5967,6527 5968,6528 VCC5.3@6065,6528 ; VCC5.5@5968,6526 VCC5.5@5970,6524 ; K1.2@5976,4843 5897,4764 5897,4719 5971,4645 6193,4645 6239,4691 ; VCC5.5@5980.45,6511.55 cw(c6020.16,6471.84) 6020.16,6528 ; VCC5.5@5980.45,6540.45 ccw(c6010.5,6570.5) 6010.5,6528 ; VCC5.5@5987.52,6504.48 cw(c6044.3,6447.7) VCC5.3@6044.3,6528 ; VCC5.5@5987.52,6547.52 ccw(c6034.64,6594.64) VCC5.3@6034.64,6528 ; VCC5.5@5987.7,6528 cw(c5987.7,6447.7) VCC5.3@6044.48,6504.48 ; VCC5.5@5997.36,6528 ccw(c5997.36,6594.64) VCC5.3@6044.48,6547.52 ; 6011.84,6528 cw(c6011.84,6471.84) VCC5.3@6051.55,6511.55 ; 6021.5,6528 ccw(c6021.5,6570.5) VCC5.3@6051.55,6540.45 ; VCC5.3@6064,6524 6067,6527 VCC5.1@6166,6527 ; VCC5.3@6080.45,6511.55 cw(c6117.74,6474.26) 6117.74,6527 ; VCC5.3@6080.45,6540.45 ccw(c6112.92,6572.92) 6112.92,6527 ; VCC5.3@6087.52,6504.48 cw(c6141.89,6450.11) VCC5.1@6141.89,6527 ; VCC5.3@6087.52,6547.52 ccw(c6137.06,6597.06) VCC5.1@6137.06,6527 ; VCC5.3@6090.11,6527 cw(c6090.11,6450.11) VCC5.1@6144.48,6504.48 ; VCC5.3@6094.94,6527 ccw(c6094.94,6597.06) VCC5.1@6144.48,6547.52 ; 6114.26,6527 cw(c6114.26,6474.26) VCC5.1@6151.55,6511.55 ; 6119.08,6527 ccw(c6119.08,6572.92) VCC5.1@6151.55,6540.45 ; VCC5.1@6166,6505.57 cw(c6166,6415.2) 6229.9,6479.1 ; VCC5.1@6166,6515.57 cw(c6166,6449.34) 6212.83,6496.17 ; VCC5.1@6196.43,6526 ccw(c6228.86,6526) 6205.93,6503.07
  Top Layer w20: v1@2940,5992 cw(c2940,5960.62) 2962.19,5982.81 ; v1@2942,6003 3035,5910 C1.1@3035,5905 ; C3.1@2965,5757 2990,5757 3022,5789 C1.1@3022,5906 ; 2966.63,5978.37 cw(c2901.76,5913.5) C1.1@2993.5,5913.5 ; C3.1@2970,5759 ccw(c2970,5812.11) 3007.56,5774.56 ; C3.1@2973.54,5750.46 cw(c2989.31,5734.69) 2989.31,5757 ; 2991.98,5953.02 ccw(c3021,5982.04) C1.1@3021,5941 ; C1.1@3001.55,5879.05 cw(c2952.19,5829.69) 3022,5829.69 ; C1.1@3021,5903 3162,5903 U1.3@3171,5912 ; 3022,5834.52 cw(c3084.98,5834.52) C1.1@3040.45,5879.05 ; C1.1@3040.45,5886.55 cw(c3080.15,5846.85) 3080.15,5903 ; C1.1@3040.45,5925.45 ccw(c3094.63,5979.63) 3094.63,5903 ; 3094.27,5903 ccw(c3094.27,5970.6) U1.3@3142.07,5922.8 ; U1.3@3167,5914 3210,5914 3260,5864 3260,5752 C20.2@3240,5732 ; U1.3@3191.65,5902.91 cw(c3191.65,5831.81) 3241.92,5882.08 ; C20.2@3236.96,5735.6 ccw(c3181.35,5791.21) 3260,5791.21 ; C20.2@3251.11,5721.46 ccw(c3229.64,5742.93) 3260,5742.93
  Bottom Layer w10: R14.2@5666,5911 v1(5707,5911) ; R14.2@5673.57,5900.99 cw(c5697.73,5876.83) v1@5697.73,5911 ; R14.2@5673.57,5915.14 ccw(c5683.55,5925.12) 5683.55,5911 ; v1@5699.93,5903.93 ccw(c5682.86,5886.86) 5682.86,5911 ccw(c5682.86,5935.14) v1@5699.93,5918.07
  Bottom Layer w20: v1@2830,6003 2837,5996 v1@2941,5996 ; v1@2834.54,6007.54 ccw(c2862.38,6035.38) 2862.38,5996
  other v1: 2940,5997 2831,6004
BOOT0: R8.1 R18.1 U3.138 | length 3199.8
  Top Layer w10: v1@4001.87,5648 4304,5648 4473.75,5817.75 4631.75,5817.75 ; v1@4010.07,5643.93 cw(c4019.9,5634.1) 4019.9,5648 ; v1@4010.07,5658.07 ccw(c4034.38,5682.38) 4034.38,5648 ; v3@4543.18,5124.18 cw(c4517.07,5098.07) U3.138@4554,5098.07 ; v3@4546.45,5122.37 cw(c4544.22,5112.85) 4554,5112.85 ; v3(4548,5129) 4548,5120 4554,5114 U3.138@4554,5098.02 ; 4632,5818 4654,5818 v1@4691,5855 ; 4673.22,5837.22 cw(c4692,5818.44) v1@4692,5845 ; 4675.64,5839.64 ccw(c4660.27,5855) v1@4682,5855 ; v1@5079,5960 R8.1@5273,5960 ; v1@5085.07,5953.93 cw(c5099.73,5939.27) 5099.73,5960 ; v1@5085.07,5968.07 ccw(c5104.56,5987.56) 5104.56,5960 ; 5246.44,5960 ccw(c5246.44,5987.56) R8.1@5265.93,5968.07 ; 5251.27,5960 cw(c5251.27,5939.27) R8.1@5265.93,5953.93
  Bottom Layer w10: R18.1@3722,5670 3845,5670 3947,5568 3947,5134 3967,5114 4529,5114 v3@4545,5130 ; R18.1@3728.07,5661.93 cw(c3747.56,5642.44) 3747.56,5670 ; R18.1@3728.07,5676.07 ccw(c3742.73,5690.73) 3742.73,5670 ; 3946,5567 4001.87,5622.87 v1@4001.87,5648 ; v1@3995.93,5643.93 cw(c3981.59,5629.59) 4001.87,5629.59 ; 4001.87,5624.13 cw(c4029.87,5624.13) v1@4010.07,5643.93 ; 4529.54,5114.54 cw(c4548,5096.09) v3@4548,5122.19 ; v1@4692,5865 ccw(c4692,5889.14) 4709.07,5872.07 ccw(c4726.14,5855) v1@4702,5855 ; v1@4700.5,5863.5 4797,5960 v1@5074,5960 ; 5051.44,5960 ccw(c5051.44,5987.56) v1@5070.93,5968.07 ; 5056.27,5960 cw(c5056.27,5939.27) v1@5070.93,5953.93
  other v1: 4003,5651 4692,5855 5078,5961
BOOT1: P4.35 R9.2 U3.48 | length 1926.9
  Top Layer w10: U3.48@4457,5922 4457,6170.19 4650,6363.19 ; P4.35@4630.85,6403.35 cw(c4598.32,6363.19) 4650,6363.19 ; P4.35@4637.14,6411.12 cw(c4615.3,6384.16) 4650,6384.16 cw(c4684.7,6384.16) P4.35@4662.86,6411.12 ; P4.35@4650,6427 4650,6363.19 ; P4.35@4669.15,6403.35 ccw(c4701.68,6363.19) 4650,6363.19 ; v1@5166,6016 5199,6016 5243,6060 R9.2@5267,6060 ; v1@5171.07,6011.93 cw(c5180.9,6002.1) 5180.9,6016 ; v1@5171.07,6026.07 ccw(c5195.38,6050.38) 5195.38,6016 ; 5244.2,6060 ccw(c5244.2,6084.36) R9.2@5261.43,6067.14 ; 5244.51,6060 cw(c5244.51,6036.08) R9.2@5261.43,6052.99
  Bottom Layer w10: P4.35@4650,6426 4698.08,6377.92 4744.08,6377.92 4779,6343 4779,6231 4838,6172 5045,6172 5158,6059 5158,6022 v1@5164,6016 ; P4.35@4650.8,6406.58 cw(c4652.39,6365.59) 4681.4,6394.6 ; P4.35@4651.19,6396.59 cw(c4653.61,6334.46) 4697.57,6378.43 cw(c4739.55,6420.4) P4.35@4680.35,6424.76 ; P4.35@4670.38,6425.5 ccw(c4710.79,6422.52) 4682.14,6393.86 ; 5158,6033.49 ccw(c5178.49,6033.49) v1(5164,6019) ; 5158,6057.63 ccw(c5202.63,6057.63) v1@5171.07,6026.07
"CH340 D+": U2.5 USB.3 | length 1024.2
  Top Layer w15.75: USB.3@2808,4867 2940,4867 3167,5094 v1@3167,5266 ; v1@3160.96,5264.96 cw(c3146.38,5250.38) 3167,5250.38 ; v1@3177,5444 3187,5454 U2.5@3263,5454 ; v1@3183.04,5438.96 cw(c3219.35,5402.65) 3219.35,5454 ; 3221.22,5454 cw(c3221.22,5441.08) U2.5@3230.36,5450.22
  Bottom Layer w15.75: v1@3165,5270 3201,5306 3201,5395 ; v1@3166,5277.13 ccw(c3166,5291.92) 3176.46,5281.46 ; v1@3173.13,5270 cw(c3192.74,5270) 3178.87,5283.87 ; 3176,5421.97 cw(c3200.03,5421.97) v1@3183.04,5438.96 ; v1@3176,5443 3176,5419 3199,5396
  other v1: 3166,5270 3178,5444
"CH340 D-": U2.6 USB.2 | length 813.1
  Top Layer w20: USB.2@2801,4897 2911,4897 3039,5025 3039,5216 3229,5406 U2.6@3273,5406 ; 3217.86,5394.86 cw(c3233.14,5379.57) U2.6@3233.14,5401.19 ; U2.6@3267,5402 U2.6@3268,5403